# Altium PCB funcgen.PcbDoc
Units mm, origin at the board's own origin, x right, y up, seen from the top; angles counter-clockwise.
Board outline 110 x 196.9 mm, 2 copper layers (Top Layer, Bottom Layer); 50 components, 63 nets, 180 pads, 13 vias.
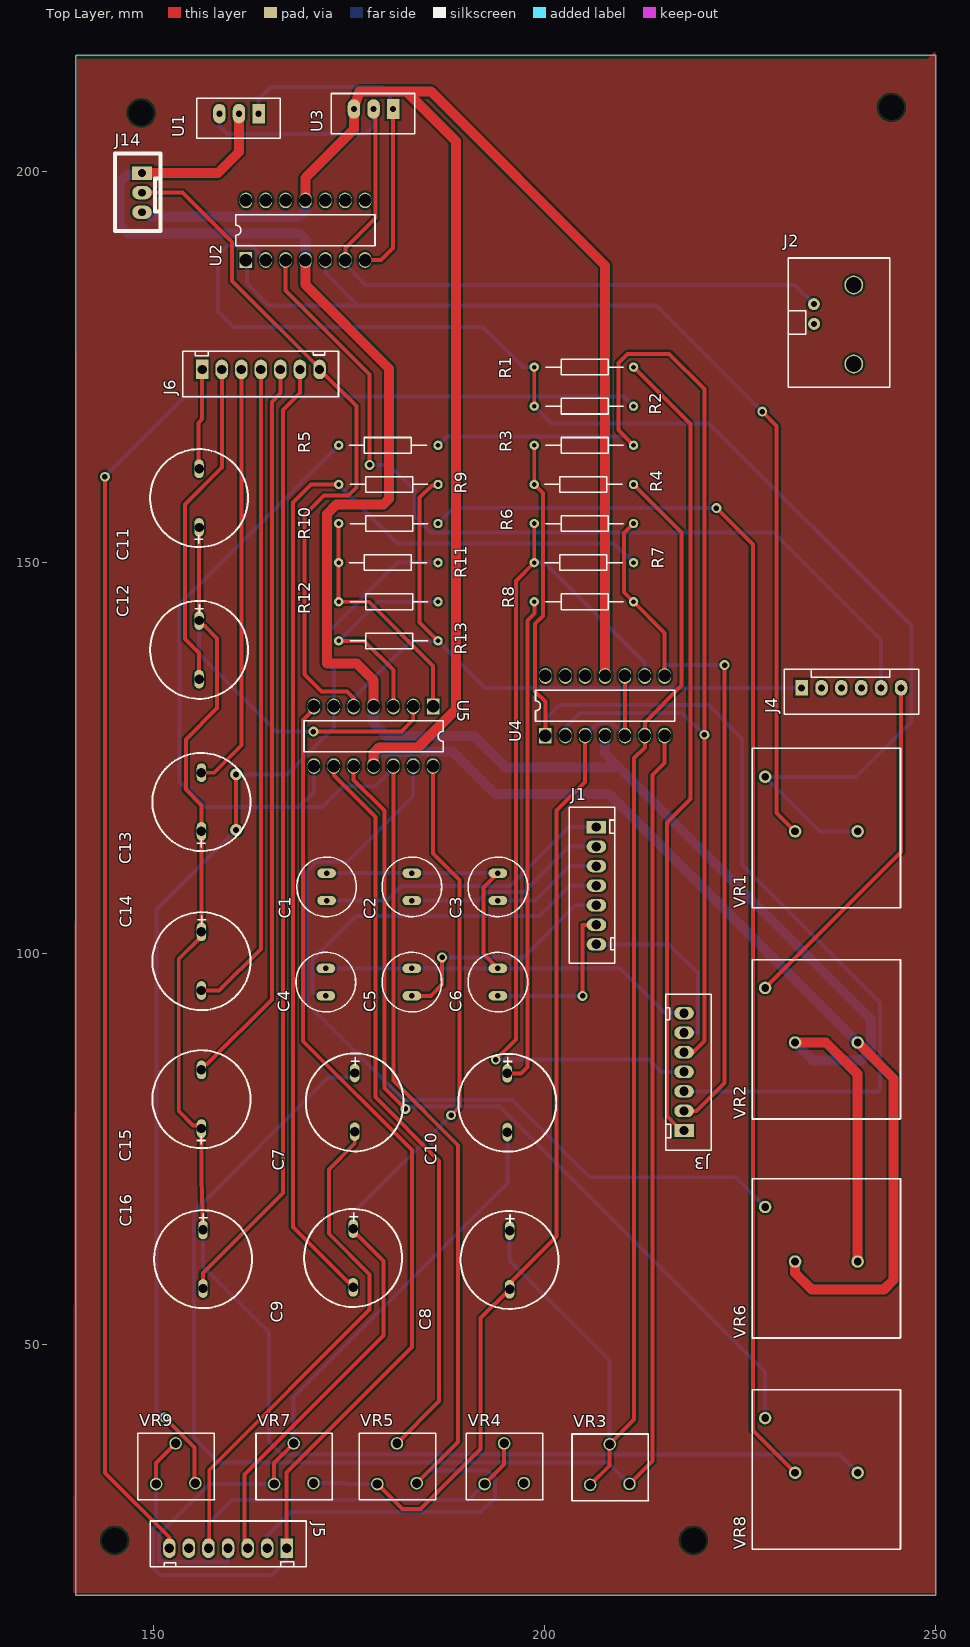
[diagram p0: Top Layer view]
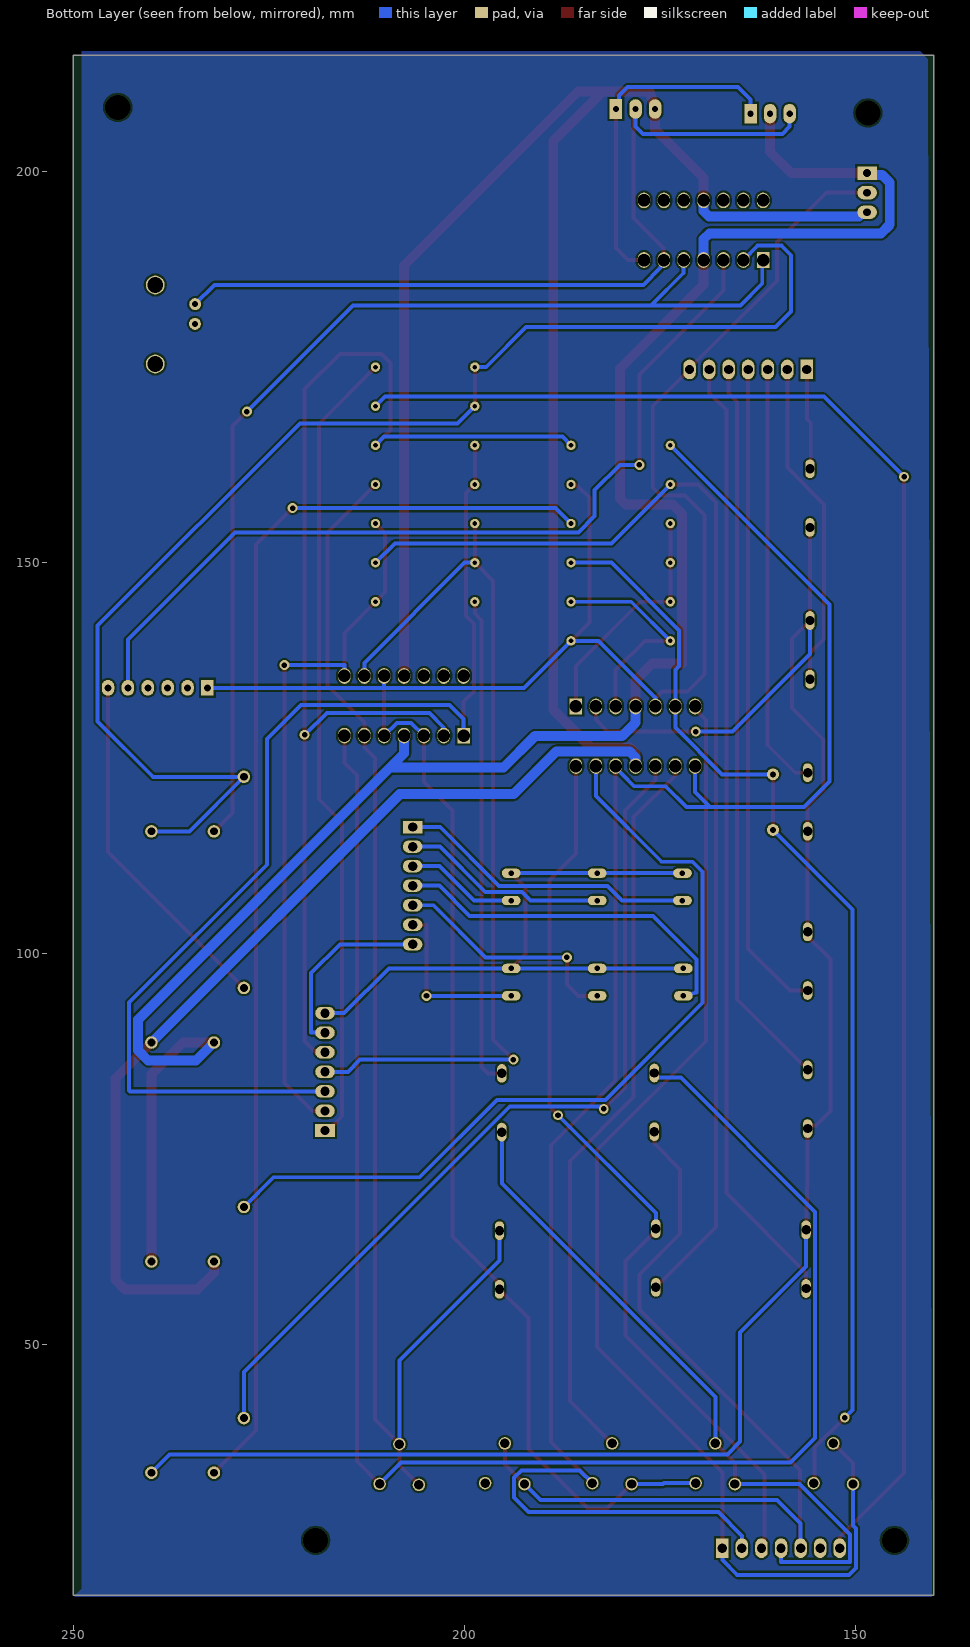
[diagram p1: Bottom Layer view, seen from below]
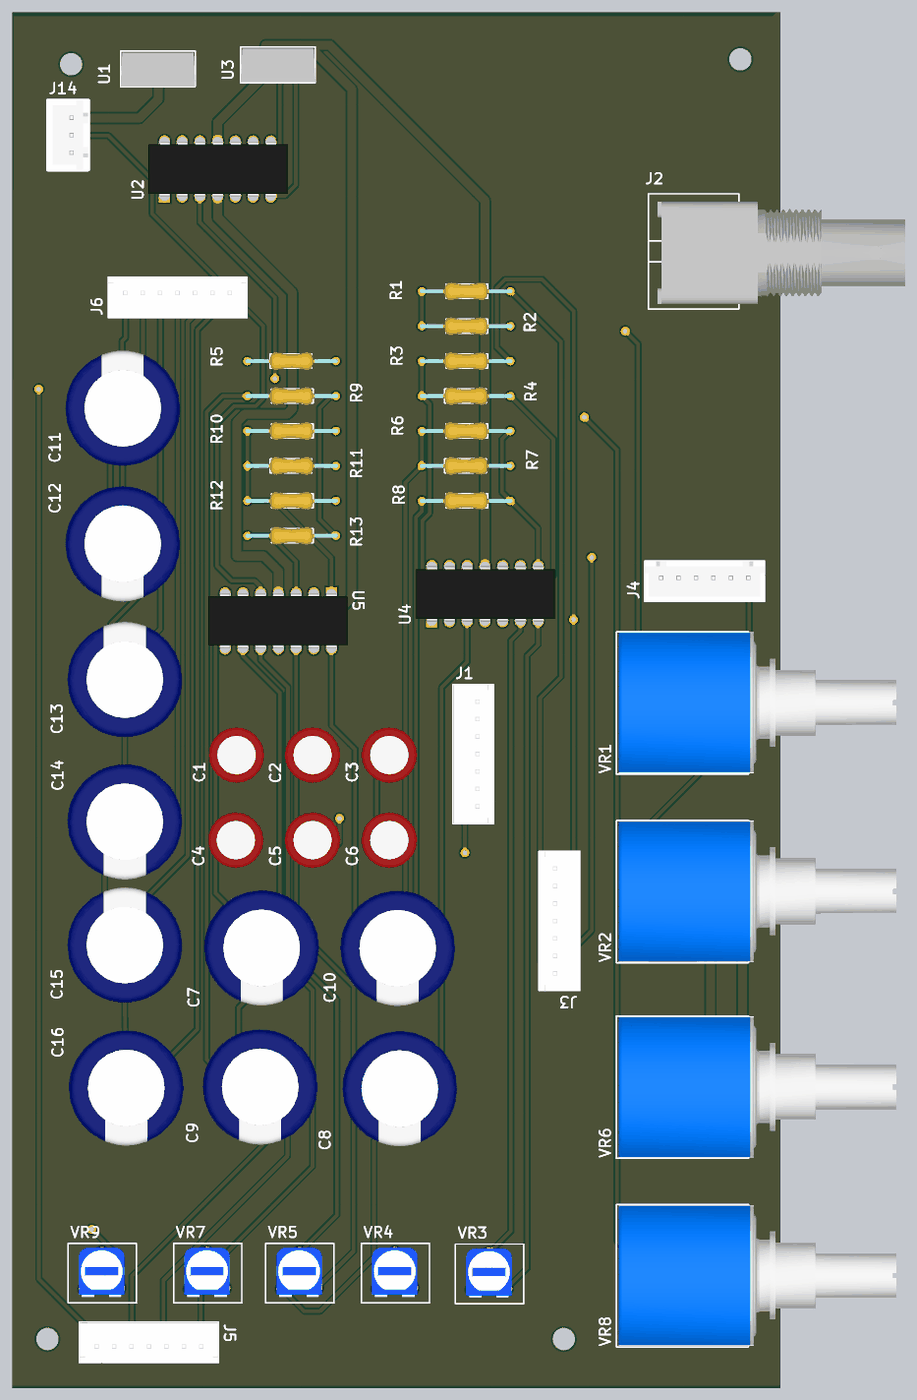
[diagram p2: 3D render of the assembled board from above, using the file's embedded part models]

## Layer stack, top to bottom
Top Solder: solder mask 0.0102, Solder Resist, Dk 3.5
Top Layer: signal copper 0.0356
Dielectric 1: dielectric 0.32, FR-4, Dk 4.8
Bottom Layer: signal copper 0.0356
Bottom Solder: solder mask 0.0102, Solder Resist, Dk 3.5

## Board outline
140,18 250,18 250,214.9 140,214.9

## Design rules (kind name [scope] priority, off if disabled: settings)
Clearance [All] p1: gap=0.254 ignorepadtopadclearanceinfootprint=FALSE except(0: Arc-Hole Track-Hole SMDPad-Hole THPad-Hole Via-Hole Fill-Hole Poly-Hole Region-Hole Text-Hole)
ComponentClearance [All] p1: gap=0.254 collisioncheckmode=3 verticalgap=0.254 showdistances=TRUE
Height [All] p1: minheight=0 maxheight=50 prefheight=12.7
PolygonConnect [All] p1: connectstyle=Relief reliefconductorwidth=0.254 reliefentries=4 polygonreliefangle="90 Angle" airgapwidth=0.254
RoutingVias [All] p1: holewidth=0.711 width=1.27 viastyle="Through Hole" minholewidth=0.711 minwidth=1.27 maxholewidth=0.711 maxwidth=1.27
SolderMaskExpansion [All] p1: expansion=0.102 istentingtop=FALSE
Width [(InNet('Vcc+') OR InNet('Vcc-'))] p1: maxlimit=1.27 minlimit=1.27 preferedwidth=1.27
Width Width_2 [All] p2: maxlimit=0.8 minlimit=0.508 preferedwidth=0.508
28 further rules are at their usual default settings.

## Components (designator, comment, footprint, x,y, rotation, side; value= is the part's Value field where it differs from the comment)
C1 "Cap_NP" "CAP NP" 172.1,106.8 r90 top
C2 "Cap_NP" "CAP NP" 183,106.8 r90 top
C3 "Cap_NP" "CAP NP" 194,106.8 r90 top
C4 "Cap_NP" "CAP NP" 172,94.621 r90 top
C5 "Cap_NP" "CAP NP" 183,94.621 r90 top
C6 "Cap_NP" "CAP NP" 194,94.621 r90 top
C7 "Cap_pol" "CAP POL" 175.7,81 r270 top value=10uF
C8 "Cap_pol" "CAP POL" 195.5,60.85 r270 top value=10uF
C9 "Cap_pol" "CAP POL" 175.5,61.1 r270 top value=1uF
C10 "Cap_pol" "CAP POL" 195.2,80.95 r270 top value=10uF
C11 "Cap_pol" "CAP POL" 155.8,158.25 r90 top value=10u
C12 "Cap_pol" "CAP POL" 155.8,138.85 r270 top value=1u
C13 "Cap_pol" "CAP POL" 156.1,119.4 r90 top value=100n
C14 "Cap_pol" "CAP POL" 156.1,99.05 r270 top value=10n
C15 "Cap_pol" "CAP POL" 156.1,81.4 r90 top value=1n
C16 "Cap_pol" "CAP POL" 156.3,60.95 r270 top value=100p
J1 "JST_7p" JST_7P 206.6,116.2 r0 top
J2 "BNC" BNC 236.6,180.2 r270 top
J3 "JST_7p" JST_7P 217.8,77.4 r180 top
J4 "Pin Header" JST_6p 239.19,134 r90 top
J5 "JST_7p" JST_7P 167,24 r270 top
J6 "JST_7p" JST_7P 156.2,174.7 r90 top
J14 "Jst" JST_3P 148.5,199.8 r0 top
R1 "Res" RES 205,175 r180 top value=1k
R2 "Res" RES 205,170 r180 top value=10k
R3 "Res" RES 205,165 r180 top value=50k
R4 "Res" RES 205,160 r0 top value=1k
R5 "Res" RES 180,165 r0 top value=5k
R6 "Res" RES 205,155 r180 top value=50k
R7 "Res" RES 205,150 r0 top value=3k
R8 "Res" RES 205,145 r180 top value=1k
R9 "Res" RES 180,160 r180 top value=10k
R10 "Res" RES 180,155 r180 top value=100k
R11 "Res" RES 180,150 r0 top value=10k
R12 "Res" RES 180,145 r180 top value=11.6k
R13 "Res" RES 180,140 r180 top value=1k
U1 "TIP 31" "TIP 31" 163.4,207.4 r270 top
U2 "TL084" TL084 169.4,192.5 r90 top
U3 "TIP 32" "TIP 31" 180.6,208 r270 top
U4 "TL084" TL084 207.7,131.7 r90 top
U5 "TL084" TL084 178.1,127.8 r270 top
VR1 "POT_MT" "POT MT" 240,115.65 r180 top value=10k
VR2 "POT_MT" "POT MT" 240,88.65 r180 top value=100k
VR3 "VRes" VERRES 204.525,34.45 r0 top value=10k
VR4 "VRes" VERRES 191.025,34.55 r0 top value=5k
VR5 "VRes" VERRES 177.325,34.55 r0 top value=100k
VR6 "POT_MT" "POT MT" 240,60.65 r180 top value=10k
VR7 "VRes" VERRES 164.125,34.55 r0 top value=5k
VR8 "POT_MT" "POT MT" 240,33.65 r180 top value=100k
VR9 "VRes" VERRES 149.025,34.55 r0 top value=10k

## Footprints (in the part's own frame and the unit in brackets; to place one, negate y for a bottom-side part, rotate by r counter-clockwise, add the part's x,y. Pads: shape width x height; smd on the part's side, far side on the other; paste and mask are expansions set on the pad)
BNC [mm]
  round 1.524 hole 0.762: 1(-2.85,-2.2) 2(-0.325,-2.175)
  round 2.4 hole 2: ""(-5.3,2.9) ""(4.8,2.9)
  silkscreen extent -8.75,-5.5 7.75,7.5, body extent -7.65,-4.2 7.05,31.3, height 15.21
"CAP NP" [mm]
  oval 1.2x2.388 hole 0.7: 1(0,0) 2(3.5,0)
  silkscreen extent -2.06,-3.81 5.56,3.81, body extent -2.2,-4 5.8,4, height 12
"CAP POL" [mm]
  oval 2.388x1.2 hole 1.2: 1(-3.75,0) 2(3.75,0)
  silkscreen extent -6.26,-6.26 6.26,6.26, body extent -8.25,-8.25 8.26,8.25, height 25.75
JST_3P [mm]
  rect 2.5x1.7 hole 1: 1(0,0)
  oval 2.5x1.7 hole 1: 2(0,-2.5) 3(0,-5)
  silkscreen extent -3.45,-7.4 2.37,2.5, body extent -3.42,-7.4 2.33,2.5, height 7.01
JST_6p [mm]
  rect 2x1.6 hole 0.9: 1(0,6.35)
  oval 2x1.6 hole 0.9: 2(0,3.81) 3(0,1.27) 4(0,-1.27) 5(0,-3.81) 6(0,-6.35)
  silkscreen extent -3.4,-8.6 2.4,8.6, body extent -3.43,-8.69 2.32,8.71, height 7.01
JST_7P [mm]
  rect 2.5x1.6 hole 1.2: 1(0,0)
  oval 2.5x1.6 hole 1.2: 2(0,-2.5) 3(0,-5) 4(0,-7.5) 5(0,-10) 6(0,-12.5) 7(0,-15)
  silkscreen extent -3.47,-17.42 2.35,2.5, body extent -3.35,-17.4 2.4,2.5, height 7.01
"POT MT" [mm]
  round 1.6 hole 1: 1(0,0) 2(11.825,-6.975) 3(8,0)
  silkscreen extent -5.47,-10.6 13.47,9.77, body extent -26.66,-10.55 13.15,9.65, height 23.25
RES [mm]
  round 1.2 hole 0.6: 1(-6.35,0) 2(6.35,0)
  silkscreen extent -5,-1 4.9,1, body extent -6.63,-1.27 6.63,1.27, height 2.79
"TIP 31" [mm]
  rect 2.5x1.6 / inner rect 2.5x16 / far side rect 2.5x1.6 hole 0.8: 1(0,0)
  oval 2.5x1.6 / inner oval 2.5x16 / far side oval 2.5x1.6 hole 0.8: 2(0,-2.5) 3(0,-5)
  silkscreen extent -1.97,-7.9 3.15,2.77, body extent -1.73,-7.88 3.1,2.78, height 22.62
TL084 [mm]
  rect 2x1.6 hole 1.6: 1(-3.81,7.62)
  oval 2x1.6 hole 1.6: 2(-3.81,5.08) 3(-3.81,2.54) 4(-3.81,0) 5(-3.81,-2.54) 6(-3.81,-5.08) 7(-3.81,-7.62) 8(3.81,-7.62) 9(3.81,-5.08) 10(3.81,-2.54) 11(3.81,0) 12(3.81,2.54) 13(3.81,5.08) 14(3.81,7.62)
  silkscreen extent -1.98,-8.89 1.97,8.89, body extent -3.96,-10.05 3.91,9.95, height 5.1
VERRES [mm]
  round 1.6 hole 1.2: 1(1.275,-2.35) 2(3.775,2.85) 3(6.3,-2.225)
  silkscreen extent -1.05,-4.37 8.75,4.15, body extent 0.5,-3.52 7,3.52, height 7.41

## Part data
J4: library part JST_6p
J14: library part Jst_3p

## Free pads (board coordinates)
  round 1.524 hole 3.2: 18(148.4,207.5) 19(145,25) 20(244.3,208.2) 21(219,25)
  round 1.524 hole 0.762: 22(160.528,115.824) 22(160.528,122.936)

## Via types
v1: diameter 1.27, hole 0.711, Top Layer to Bottom Layer, 13 vias

## Nets (pads, with @x,y where several pads share a name; then routed paths per layer and width w, separated by ;. In a path a pad name is that pad's centre, name@x,y a point inside that pad or via, vN(x,y) a via of type N, cw(c..) or ccw(c..) an arc to the next point about the centre after c; other vN are vias at no path point)
1IN+: R12.1 R13.2 U5.3 | length 28
  Top Layer w0.508: R13.2 176.911,140 180.64,136.271 U5.3
  Bottom Layer w0.508: R13.2 178.65,145 R12.1
1IN-: C11.1 C12.1 C13.1 C14.1 C15.1 C16.1 U5.2 VR8.1 | length 241.9
  Top Layer w0.508: C11.1 155.8,142.193 156.12,141.874 156.526,141.874 158.1,140.3 158.1,131.4 154.1,127.4 154.1,120.974 156.1,118.974 C13.1 C14.1 156.1,102.21 153.2,99.31 153.2,79.9 155.036,78.064 155.78,78.064 156.1,77.745 C15.1 ; C15.1@156.1,77.648 156.1,71.269 C16.1 ; v1(170.4,128.4) 181.661,128.4 183.18,129.919 U5.2
  Bottom Layer w0.508: C12.1 155.8,138.307 165.707,128.4 v1(170.4,128.4) ; C16.1 156.3,60.006 164.744,51.562 164.744,37.617 166.37,35.992 237.658,35.992 VR8.1
2IN+: C8.2 J4.1 J6.7 J14.2 R9.1 R13.1 U4.3 U4.5 U4.10 U5.5 VR5.1 VR7.3 | length 313.5
  Top Layer w0.508: J14.2 153.7,197.3 160.02,190.98 160.02,186.034 J6.7@171.2,174.854 ; J6.7 175.9,170 175.9,159.6 174.872,158.572 171.772,158.572 169.3,156.1 169.3,135.7 171.447,133.553 174.722,133.553 175.56,132.715 U5.5 ; VR5.1 181.8,29 184.1,29 191.8,36.7 191.8,53.4 C8.2 195.5,57.832 201.5,63.832 201.5,118.285 205.16,121.945 U4.3 ; R13.1 184,142.35 184,158.3 185.57,159.87 186.22,159.87 R9.1 ; U4.5 U4.10
  Bottom Layer w0.508: VR7.3 174.447,32.325 174.572,32.2 VR5.1 ; U5.5 175.56,132.715 182.845,140 R13.1 192.365,133.985 210.215,133.985 210.24,134.01 ; U4.3 206.785,129.515 208.615,129.515 U4.5 ; U4.10 210.24,134.01 ; J4.1 232.84,133.985 210.24,133.985 210.24,134.01
2IN-: pad.22 R11.2 U5.6 VR9.3 | length 141.9
  Top Layer w0.508: v1(151.35,40.7) 155.2,36.85 155.2,32.45 VR9.3 ; pad.22@160.528,115.824 pad.22@160.528,122.936
  Bottom Layer w0.508: v1(151.35,40.7) 151.35,40.712 150.368,41.694 150.368,105.664 pad.22@160.528,115.824 ; pad.22@160.528,122.936 167.056,122.936 173.02,128.9 U5.6 173.02,136.301 172.517,136.804 172.517,141.326 181.191,150 R11.2
3IN+: U5.10 VR8.2 | length 112.7
  Top Layer w0.508: U5.10 175.56,122.23 179.476,118.313 179.476,82.855 v1(182.169,80.162)
  Bottom Layer w0.508: v1(182.169,80.162) 182.499,80.493 194.183,80.493 228.175,46.501 VR8.2
3IN-: U5.9 VR5.2 | length 94.4
  Top Layer w0.508: U5.9 173.02,122.814 178.333,117.5 178.333,81.692 186.5,73.525 186.5,42.8 VR5.2
4IN+: J5.2 R5.1 U5.8 U5.12 VR5.3 | length 232
  Top Layer w0.508: U5.12 180.64,83.774 188.9,75.514 188.9,37.6 VR5.3
  Bottom Layer w0.508: J5.2 164.5,25.578 167.523,28.6 191.77,28.6 193.624,30.455 193.624,33.02 192.684,33.96 185.26,33.96 VR5.3 ; U5.8 170.48,120.696 168.554,118.77 ; R5.1 153.3,144.65 153.3,122.036 156.566,118.77 168.554,118.77 ; U5.12 180.64,123.78 179.796,122.936 178.272,121.412 174.244,121.412 171.602,118.77 168.554,118.77
4IN-: U5.13 VR6.2 | length 107.7
  Bottom Layer w0.508: U5.13 183.18,120.188 174.752,111.76 170.815,111.76 169.536,110.481 169.536,93.735 181.948,81.323 195.842,81.323 205.74,71.425 224.375,71.425 VR6.2
5IN-: J3.5 R3.1 R5.2 U4.2 | length 158
  Top Layer w0.508: R3.1 209.4,166.95 209.4,175.5 210.6,176.7 215.9,176.7 220.401,172.199 220.401,128.251 v1@220.801,127.851 ; J3.5 218.948,87.4 220.4,88.852 v1(220.4,128)
  Bottom Layer w0.508: R5.2 187.466,166.116 210.234,166.116 R3.1 ; U4.2 202.62,128.935 204.47,130.785 217.551,130.785 v1@220.268,128.068
6IN-: C8.1 R4.2 U4.6 VR3.1 VR3.2 | length 167.9
  Top Layer w0.508: VR3.1 208.3,34.6 VR3.2 211.43,40.43 211.43,125.04 212.78,126.39 U4.6 212.78,129.57 217.5,134.29 217.5,153.85 R4.2
  Bottom Layer w0.508: C8.1 195.5,60.782 208.3,47.982 VR3.2
7IN-: J3.4 R6.2 R7.1 U4.9 | length 116.4
  Top Layer w0.508: v1(193.726,86.462) 196.3,89.036 196.3,147.65 R7.1 R6.2
  Bottom Layer w0.508: v1(193.726,86.462) 213.322,86.462 214.884,84.9 J3.4 ; R7.1 199.94,150 212.78,137.16 U4.9
AOUT1: R10.2 R11.1 R12.2 U5.1 | length 30.6
  Top Layer w0.508: R10.2 R11.1 R12.2 177.5,145 185.72,136.78 U5.1
AOUT2: J5.1 U5.7 VR9.1 VR9.2 | length 157.3
  Top Layer w0.508: VR9.1 150.3,34.9 VR9.2 ; J5.1 167,33.701 183,49.701 183,74.912 169.1,88.812 169.1,129.9 U5.7@170.6,131.4
  Bottom Layer w0.508: VR9.1 150.3,26.89 149.93,26.52 149.93,21.48 150.836,20.574 165.1,20.574 167,22.474 J5.1
AOUT4: C9.1 J5.3 U5.14 | length 116.3
  Top Layer w0.508: J5.3 162,24.745 161.6,25.145 161.6,33.4 179.4,51.2 179.4,60.7 176.127,63.973 175.97,63.973 175.5,64.443 C9.1 ; U5.14 185.72,112.806 189.1,109.426 189.1,80.439 v1(188.011,79.35)
  Bottom Layer w0.508: C9.1 175.5,66.838 v1(188.011,79.35)
AOUT5: J3.3 R3.2 R4.1 U4.1 | length 145.7
  Top Layer w0.508: R3.2 R4.1 199.771,158.879 199.771,143.205 198.755,142.189 198.755,133.553 200.08,132.228 U4.1
  Bottom Layer w0.508: U4.1 200.08,130.001 201.879,131.801 220.899,131.801 225.222,127.478 225.222,111.379 242.849,93.751 242.849,82.499 242.75,82.4 J3.3
AOUT6: C7.1 U4.7 VR3.3 | length 212.8
  Top Layer w0.508: VR3.3 213.741,35.141 213.741,122.83 215.32,124.409 U4.7
  Bottom Layer w0.508: C7.1 175.7,84.15 172.314,84.15 155.169,67.005 155.169,38.1 158.293,34.976 208.074,34.976 VR3.3
AOUT7: J3.2 R6.1 R8.1 U4.8 | length 91.3
  Top Layer w0.508: R6.1 210.134,153.784 210.134,146.216 R8.1 215.32,141.03 U4.8 ; J3.2 219.405,79.9 223,83.495 v1(223,136.9)
  Bottom Layer w0.508: U4.8 215.32,136.9 v1(223,136.9)
INTA: J1.7 J3.6 | length 23.9
  Bottom Layer w0.508: J1.7 215.9,101.2 219.583,97.517 219.583,89.9 J3.6
INTB: C1.2 C2.2 C3.2 C4.2 C5.2 C6.2 J3.7 | length 83.8
  Top Layer w0.508: C6.2 192.176,99.944 192.176,108.476 C3.2
  Bottom Layer w0.508: C4.2 C5.2 C6.2 209.646,98.121 215.367,92.4 J3.7 ; C1.2 177.546,110.3 C2.2 C3.2
JC1: 
JC2: 
JC3: 
JC4: 
JC5: 
JC6: 
JF1: 
JF2: 
JF3: 
JF4: 
JF5: 
JF6: 
NetC1_1: C1.1 J1.1 | length 38.4
  Bottom Layer w0.508: C1.1 179.825,106.8 181.695,108.67 195.538,108.67 203.068,116.2 J1.1
NetC2_1: C2.1 J1.2 | length 26.5
  Bottom Layer w0.508: C2.1 191.534,106.8 192.642,107.908 197.316,107.908 203.108,113.7 J1.2
NetC3_1: C3.1 J1.3 | length 14.4
  Bottom Layer w0.508: C3.1 198.748,106.8 203.148,111.2 J1.3
NetC4_1: C4.1 J1.4 | length 46.2
  Bottom Layer w0.508: C4.1 170.298,95.061 170.298,99.238 175.886,104.826 199.314,104.826 203.188,108.7 J1.4
NetC5_1: C5.1 J1.5 | length 30.4
  Top Layer w0.508: C5.1 185.42,94.621 186.868,96.068 v1(186.868,99.543)
  Bottom Layer w0.508: v1(186.868,99.543) 197.256,99.543 203.914,106.2 J1.5
NetC6_1: C6.1 J1.6 | length 21.7
  Top Layer w0.508: v1(204.826,94.621) 204.826,103.7 J1.6
  Bottom Layer w0.508: C6.1 v1(204.826,94.621)
NetC9_2: C9.2 R7.2 R9.2 | length 152.4
  Top Layer w0.508: R9.2 170.098,160 167.81,157.712 167.81,65.04 174.773,58.076 175.18,58.076 175.5,57.757 C9.2
  Bottom Layer w0.508: R9.2 181.174,152.476 208.874,152.476 R7.2
NetC10_1: C10.1 R8.2 | length 62.8
  Top Layer w0.508: C10.1 195.216,84.684 196.984,84.684 197.8,85.5 197.8,142.631 198.653,143.485 198.653,145 R8.2
NetC11_2: C11.2 J6.1 | length 12.9
  Top Layer w0.508: C11.2 155.7,162.1 155.7,167.85 156.2,168.35 J6.1
NetC12_2: C12.2 J6.2 | length 42.3
  Top Layer w0.508: C12.2 155.8,138.43 154,140.23 154,157.454 158.7,162.154 J6.2
NetC13_2: C13.2 J6.3 | length 54.6
  Top Layer w0.508: C13.2 156.1,123.139 157.683,123.139 161.2,126.656 J6.3
NetC14_2: C14.2 J6.4 | length 83.9
  Top Layer w0.508: C14.2 156.1,95.275 158.344,95.275 163.7,100.632 163.7,153.261 J6.4
NetC15_2: C15.2 J6.5 | length 94
  Top Layer w0.508: C15.2 156.1,85.557 156.42,85.876 156.826,85.876 165.1,94.15 165.1,170.561 166.2,171.661 J6.5
NetC16_2: C16.2 J6.6 | length 122.6
  Top Layer w0.508: C16.2 156.3,59.182 166.5,69.382 166.5,169.497 168.7,171.697 J6.6
NetC17_2: 
NetC20_1: 
NetJ12_1: 
NetJ12_3: 
NetR1_2: R1.2 R2.2 U2.2 VR1.1 VR1.2 | length 171.4
  Top Layer w0.508: R2.2 198.65,172.491 R1.2
  Bottom Layer w0.508: U2.2 162.494,190.516 159.416,190.516 158.2,189.3 158.2,182.1 160.2,180.1 192.086,180.1 197.186,175 R1.2 ; R2.2 200.85,167.8 220.998,167.8 246.863,141.935 246.863,129.718 239.77,122.625 VR1.2 235.15,115.65 VR1.1
NetR10_1: R10.1 VR8.3 | length 163.9
  Top Layer w0.508: v1(221.945,156.972) 226.619,152.298 226.619,39.031 VR8.3
  Bottom Layer w0.508: R10.1 188.322,156.972 v1(221.945,156.972)
NetU1_1: U1.1 U2.7 U3.1 | length 43.6
  Top Layer w0.508: U2.7 177.02,188.671 179.07,188.671 180.6,190.201 U3.1
  Bottom Layer w0.508: U1.1 163.4,209.2 165,210.8 179.1,210.8 180.194,209.706 180.194,208.406 U3.1
OUTC1: U2.1 U2.5 VR1.3 | length 138.6
  Top Layer w0.508: v1(227.8,169.3) 229.641,167.459 229.641,118.008 VR1.3
  Bottom Layer w0.508: U2.1 161.9,188.57 161.9,185.7 164.7,182.9 176.1,182.9 ; U2.5 171.94,187.06 176.1,182.9 ; v1(227.8,169.3) 214.2,182.9 176.1,182.9
POTOF: J4.6 VR2.2 | length 45.6
  Top Layer w0.508: VR2.2 245.54,112.99 J4.6
"PWM in": C10.2 J5.4 VR7.1 VR7.2 | length 88.8
  Top Layer w0.508: VR7.1 165.4,34.9 VR7.2
  Bottom Layer w0.508: J5.4 159.5,22.242 150.692,22.242 150.692,25.756 157.136,32.2 VR7.1 ; VR7.2 167.9,43.313 195.2,70.613 C10.2
"Signal Out": J5.6
"Sine in": C7.2 J5.5 VR4.1 VR4.2 | length 112.1
  Top Layer w0.508: J5.5 157.1,24.1 157.1,34 177.6,54.5 177.6,59 172.4,64.2 172.4,72.443 175.7,75.743 C7.2 ; VR4.1 194.8,34.7 VR4.2
  Bottom Layer w0.508: J5.5 157,27.13 160.02,30.15 190.25,30.15 VR4.1
SO1X: J5.7 R2.1 | length 212.7
  Top Layer w0.508: v1(143.764,160.985) 143.764,33.636 152,25.4 J5.7
  Bottom Layer w0.508: v1(143.764,160.985) 154.026,171.247 210.103,171.247 R2.1
SO10X: J3.1 R1.1 | length 103
  Top Layer w0.508: R1.1 218.6,167.75 218.6,119.8 215.6,116.8 215.6,79.248 216.804,78.044 216.804,77.946 217.35,77.4 J3.1
SOUT: J2.1 U1.3 U2.6 U3.2 | length 108
  Top Layer w0.508: U2.6 174.532,188.741 174.532,190.232 178.333,194.033 178.333,206.706 178.309,206.731 178.309,207.791 U3.2
  Bottom Layer w0.508: U1.3 158.4,205.74 159.34,204.8 177.165,204.8 178.1,205.735 U3.2 ; U2.6 174.48,188.195 174.892,187.783 174.892,187.708 177.1,185.5 231.95,185.5 J2.1
Vcc+: J14.1 U1.2 U2.4 U4.4 U5.4 VR2.3 VR6.1 | length 262.2
  Top Layer w1.27: J14.1 158.2,199.8 160.9,202.5 U1.2 ; U2.4 169.4,185.524 180.1,174.824 180.1,158.164 179.356,157.42 173.345,157.42 172.136,156.21 172.136,137.109 172.161,137.084 175.979,137.084 178.1,134.963 U5.4 ; VR2.3 235.95,88.65 240,84.6 VR6.1
  Bottom Layer w1.27: J14.1 148.285,199.585 146.585,199.585 145.6,198.6 145.6,193.2 146.7,192.1 168.656,192.1 169.4,191.356 U2.4 ; U5.4 178.1,129.54 179.827,127.813 190.987,127.813 195,123.8 209.5,123.8 ; U4.4@207.7,127.6 207.7,125.6 209.5,123.8 ; VR2.3 234.29,86.36 240.419,86.36 241.689,87.63 241.689,91.611 209.5,123.8
Vcc-: J14.3 U2.11 U3.3 U4.11 U5.11 VR2.1 VR6.3 | length 355.1
  Top Layer w1.27: U2.11 169.4,199.2 175.6,205.4 U3.3 176.035,209.417 176.286,210.236 182.296,210.236 ; U5.11 178.1,125.656 178.844,126.4 183.829,126.4 188.62,131.191 188.62,203.911 182.296,210.236 ; U4.11 207.7,188.007 185.471,210.236 182.296,210.236 ; VR6.3 232,59.2 234.1,57.1 243.4,57.1 244.6,58.3 244.6,84.05 VR2.1
  Bottom Layer w1.27: J14.3 149.016,194.8 149.55,194.267 168.722,194.267 169.4,194.945 U2.11 ; U5.11 178.1,125.095 178.887,125.882 188.214,125.882 193.7,120.396 208.254,120.396 VR2.1
VREF: J4.5 U2.3 | length 113.4
  Top Layer w0.508: U2.3 166.86,184.82 177.6,174.08 v1(177.6,162.5)
  Bottom Layer w0.508: v1(177.6,162.5) 180.095,162.5 183.337,159.258 183.337,155.956 185.42,153.873 229.309,153.873 243,140.183 J4.5
pads on no net: J2. J2.2 J4.2 J4.3 J4.4 U2.8 U2.9 U2.10 U2.12 U2.13 U2.14 U4.12 U4.13 U4.14 VR4.3

## Polygon pours and split planes (outlines as drawn)
no net on Bottom Layer "NONET_L02_P000" (solid, pour order 0): 140.716,214.376 141.732,215.392 248.92,215.392 248.92,18.796 249.936,17.78 140.208,17.78
no net on Top Layer "NONET_L01_P001" (solid, pour order 1): 140.208,214.376 248.92,214.376 249.936,215.392 249.936,18.288 139.7,18.288

## Silkscreen, mask and mechanical layers (free items; w line width, h text height)
Mechanical 11:
  the board outline again, w2